# Altium PCB PCBV4.PcbDoc
Units mm, origin at the board's own origin, x right, y up, seen from the top; angles counter-clockwise.
Board outline 211.14 x 135.51 mm, 2 copper layers (Top Layer, Bottom Layer); 140 components, 56 nets, 344 pads, 6 vias.
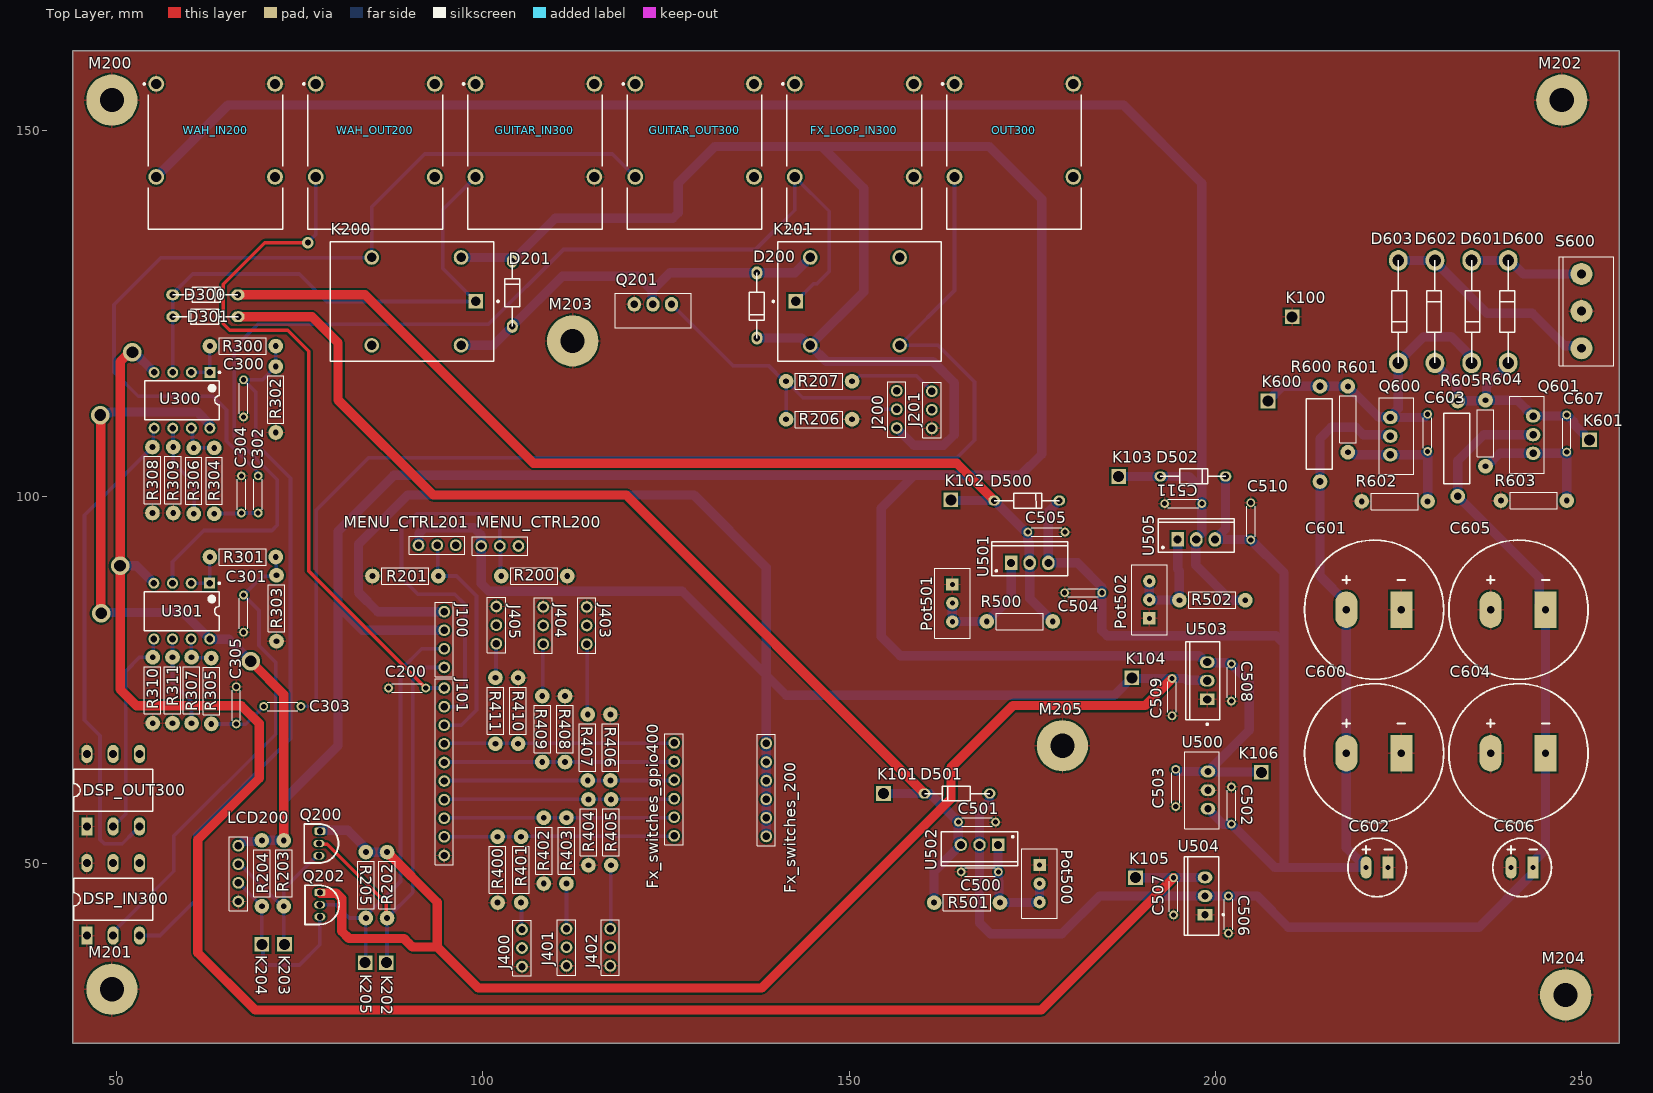
[diagram p0: Top Layer view]
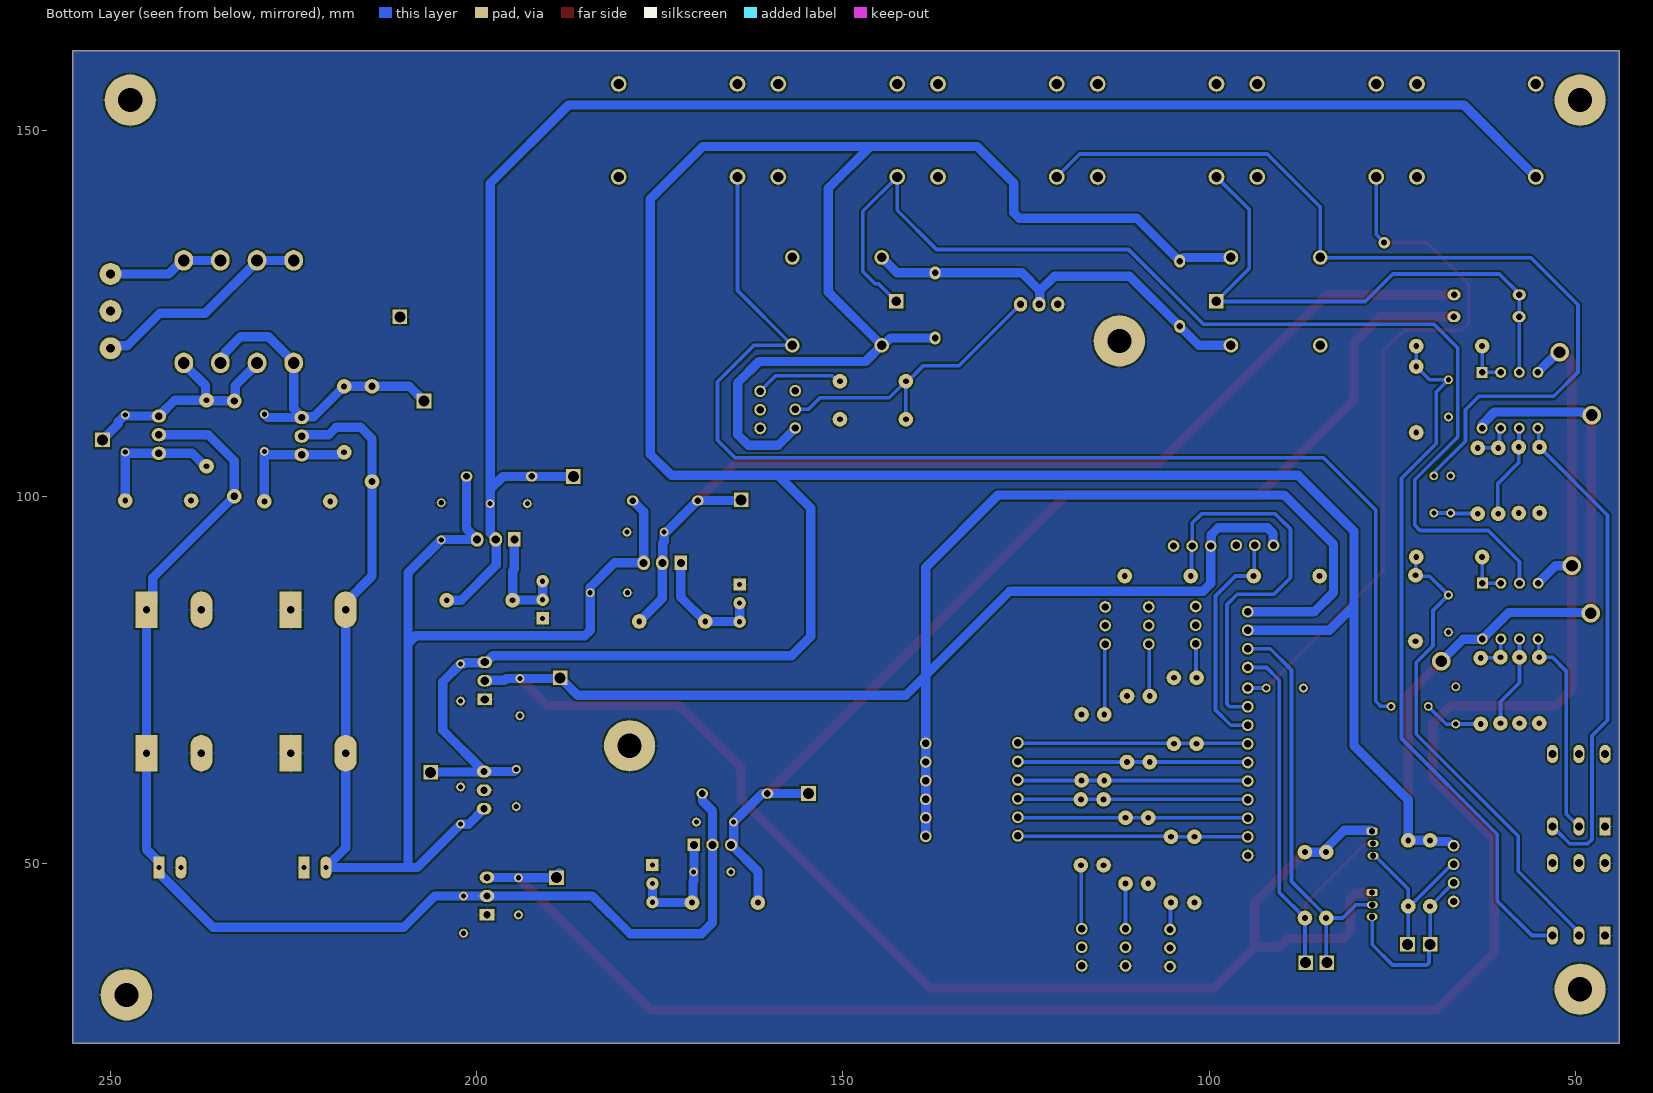
[diagram p1: Bottom Layer view, seen from below]
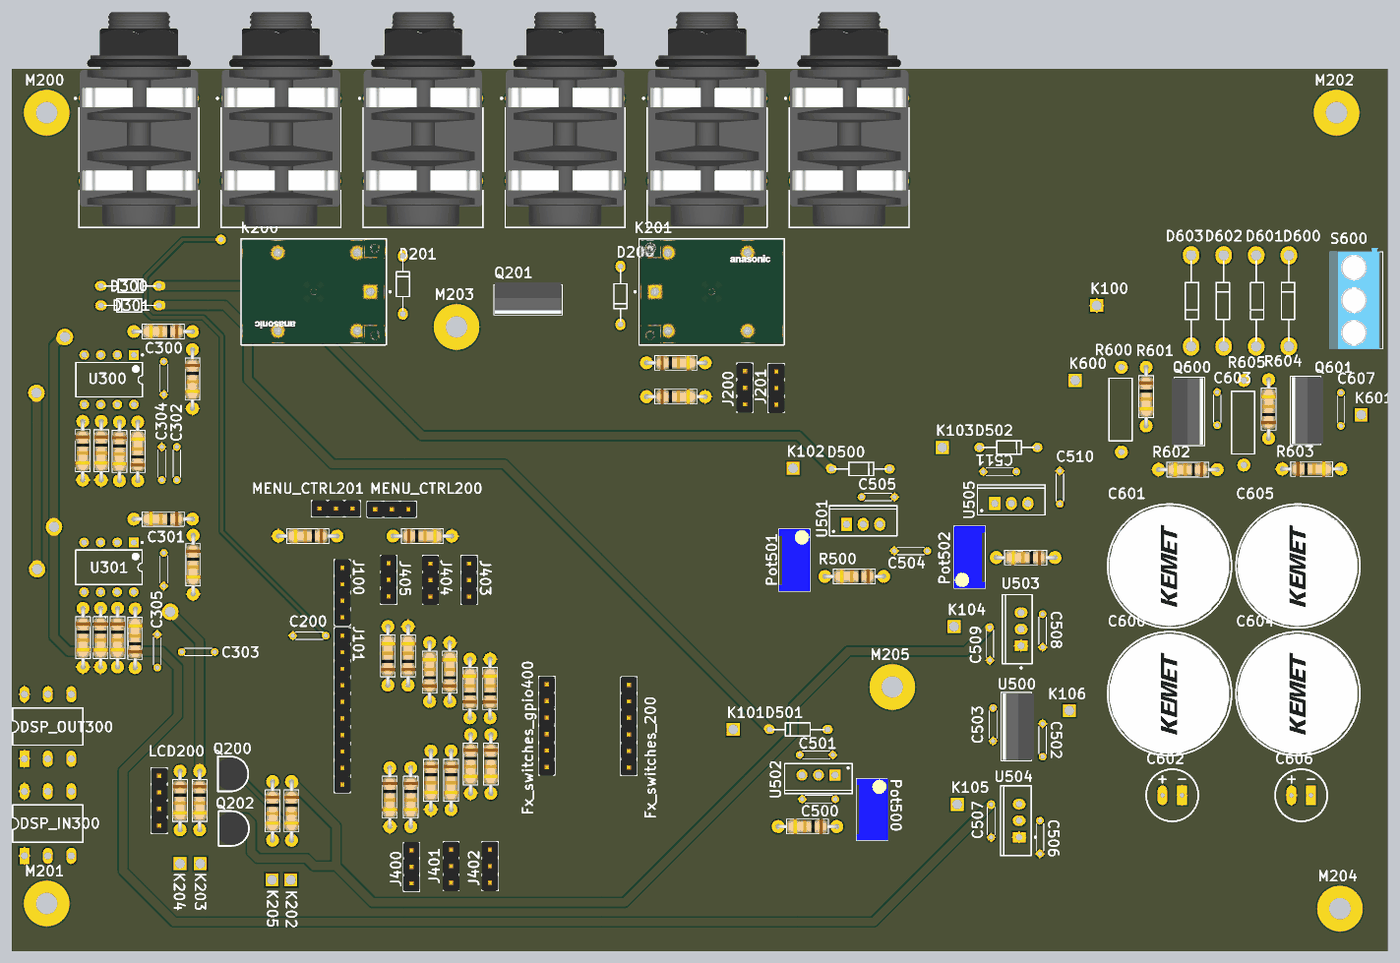
[diagram p2: 3D render of the assembled board from above, using the file's embedded part models]

## Layer stack, top to bottom
Top Solder: solder mask 0.0102, Solder Resist, Dk 3.5
Top Layer: signal copper 0.0356
Dielectric 1: dielectric 0.32, FR-4, Dk 4.8
Bottom Layer: signal copper 0.0356
Bottom Solder: solder mask 0.0102, Solder Resist, Dk 3.5

## Board outline
44,25.4 255.143,25.4 255.143,160.909 44,160.909

## Design rules (kind name [scope] priority, off if disabled: settings)
Clearance [All] p1: gap=0.254 ignorepadtopadclearanceinfootprint=FALSE
PolygonConnect [All] p1: connectstyle=Relief reliefconductorwidth=0.254 reliefentries=4 polygonreliefangle="90 Angle" airgapwidth=0.254
RoutingVias [All] p1: holewidth=0.711 width=1.27 viastyle="Through Hole" minholewidth=0.711 minwidth=1.27 maxholewidth=0.711 maxwidth=1.27
SolderMaskExpansion [All] p1: expansion=0.102 istentingtop=FALSE
Width [All] p1: maxlimit=1.27 minlimit=0.508 preferedwidth=0.508 minimp=50.000000 maximp=50.000000 favimp=50.000000
30 further rules are at their usual default settings.

## Classes and differential pairs
component class switches_LEDs: Fx_switches_gpio400 J400 J401 J402 J403 J404 J405 R400 R401 R402 R403 R404 R405 R406 R407 R408 R409 R410 R411
component class switches_connectors: C200 D200 D201 Fx_switches_200 J200 J201 K200 K201 K202 K203 K204 K205 LCD200 M200 M201 M202 M203 M204 M205 MENU_CTRL200 MENU_CTRL201 Q200 Q201 Q202 R200 R201 R202 R203 R204 R205 R206 R207 WAH_IN200 WAH_OUT200
component class regulators: C500 C501 C502 C503 C504 C505 C506 C507 C508 C509 C510 C511 D500 D501 D502 Pot500 Pot501 Pot502 R500 R501 R502 U500 U501 U502 U503 U504 U505
component class power_supply: C600 C601 C602 C603 C604 C605 C606 C607 D600 D601 D602 D603 K600 K601 Q600 Q601 R600 R601 R602 R603 R604 R605 S600
component class main: J100 J101 K100 K101 K102 K103 K104 K105 K106
component class amplifier_stage: C300 C301 C302 C303 C304 C305 D300 D301 DSP_IN300 DSP_OUT300 FX_LOOP_IN300 GUITAR_IN300 GUITAR_OUT300 OUT300 R300 R301 R302 R303 R304 R305 R306 R307 R308 R309 R310 R311 U300 U301

## Components (designator, comment, footprint, x,y, rotation, side; value= is the part's Value field where it differs from the comment)
C200 "Cap" Cap-1 87.1,73.9 r0 top value=100nF
C300 "Cap" Cap-1 67.3,110.92 r90 top value=12nF
C301 "Cap" Cap-1 67.3,81.52 r90 top value=12nF
C302 "Cap" Cap-1 69.3,102.88 r270 top value=100nF
C303 "Cap" Cap-1 75.133,71.399 r180 top value=100nF
C304 "Cap" Cap-1 67,102.88 r270 top value=5N5F
C305 "Cap" Cap-1 66.3,74.08 r270 top value=5N5F
C500 "Cap" Cap-1 170.38,48.8 r180 top value=100nF
C501 "Cap" Cap-1 164.92,55.6 r0 top value=1uF
C502 "Cap" Cap-1 202.2,60.4 r270 top value=100nF
C503 "Cap" Cap-1 194.6,57.72 r90 top value=1uF
C504 "Cap" Cap-1 179.426,86.919 r0 top value=100nF
C505 "Cap" Cap-1 179.48,95.2 r180 top value=1uF
C506 "Cap" Cap-1 201.8,45.5 r270 top value=100nF
C507 "Cap" Cap-1 194.3,48 r270 top value=1uF
C508 "Cap" Cap-1 202.2,72.12 r90 top value=10uF
C509 "Cap" Cap-1 194.1,70.12 r90 top value=10uF
C510 "Cap" Cap-1 204.851,99.212 r270 top value=100nF
C511 "Cap" Cap-1 193.091,99.085 r0 top value=1uF
C600 "Cap" "Cap Lyt Ø18" 217.9,65 r0 top value=1000uF
C601 "Cap" "Cap Lyt Ø18" 217.9,84.6 r0 top value=1000uF
C602 "Cap" "Cap Lyt Ø8" 220.6,49.4 r0 top value=220uF
C603 "Cap" Cap-1 229,106.22 r90 top value=1uF
C604 "Cap" "Cap Lyt Ø18" 237.6,65 r0 top value=1000uF
C605 "Cap" "Cap Lyt Ø18" 237.6,84.6 r0 top value=1000uF
C606 "Cap" "Cap Lyt Ø8" 240.4,49.4 r0 top value=220uF
C607 "Cap" Cap-1 248,111.2 r270 top value=1uF
D200 "1N4007" 1N4007#1 137.4,130.6 r270 top
D201 "1N4007" 1N4007#1 104,123.3 r90 top
D300 "1N4007" 1N4007#1 57.633,127.61 r0 top
D301 "1N4007" 1N4007#1 66.558,124.612 r180 top
D500 "1N4007" 1N4007#2 169.8,99.5 r0 top
D501 "1N4007" 1N4007#2 169.2,59.5 r180 top
D502 "1N4007" 1N4007#2 192.5,102.8 r0 top
D600 "Diode" "Diode 1A" 240,118.3 r90 top
D601 "Diode" "Diode 1A" 235,132.3 r270 top
D602 "Diode" "Diode 1A" 230,118.3 r90 top
D603 "Diode" "Diode 1A" 225,132.3 r270 top
DSP_IN300 "3.5MMJACK_STEREO" 3.5MMJACK_STEREO 45.9,40.1 r90 top
DSP_OUT300 "3.5MMJACK_STEREO" 3.5MMJACK_STEREO 45.9,55 r90 top
FX_LOOP_IN300 "NMJ4HFD2" FP-NMJ4HFD2-MFG 150.702,153.175 r90 top
Fx_switches_200 "Header 1x6" "Header 1x6" 138.685,53.644 r90 top
Fx_switches_gpio400 "Header 1x6" "Header 1x6" 126.1,66.42 r270 top
GUITAR_IN300 "NMJ4HFD2" FP-NMJ4HFD2-MFG 107.093,153.175 r90 top
GUITAR_OUT300 "NMJ4HFD2" FP-NMJ4HFD2-MFG 128.898,153.175 r90 top
J100 "Header 1x4" "Header 1x4" 94.7,76.72 r90 top
J101 "Header 1x10" "Header 1x10" 94.7,51.04 r90 top
J200 "Header 1x3" "Header 1x3" 156.5,109.42 r90 top
J201 "Header 1x3" "Header 1x3" 161.3,109.36 r90 top
J400 "Header 1x3" "Header 1x3" 105.325,35.86 r90 top
J401 "Header 1x3" "Header 1x3" 111.4,35.96 r90 top
J402 "Header 1x3" "Header 1x3" 117.375,35.96 r90 top
J403 "Header 1x3" "Header 1x3" 114.175,84.98 r270 top
J404 "Header 1x3" "Header 1x3" 108.225,84.98 r270 top
J405 "Header 1x3" "Header 1x3" 101.825,85.04 r270 top
K100 "Wire" "Wire 1.5mm" 210.5,124.6 r90 top
K101 "Wire" "Wire 1.5mm" 154.7,59.5 r90 top
K102 "Wire" "Wire 1.5mm" 163.9,99.6 r90 top
K103 "Wire" "Wire 1.5mm" 186.8,102.8 r90 top
K104 "Wire" "Wire 1.5mm" 188.6,75.3 r90 top
K105 "Wire" "Wire 1.5mm" 189.1,48 r90 top
K106 "Wire" "Wire 1.5mm" 206.3,62.4 r90 top
K200 "JS1-5V-F" FP-JS1-5V-F-MFG 90.3,126.7 r180 top
K201 "JS1-5V-F" FP-JS1-5V-F-MFG 151.4,126.7 r0 top
K202 "Wire" "Wire 1.5mm" 86.8,36.4 r90 top
K203 "Wire" "Wire 1.5mm" 72.9,38.9 r90 top
K204 "Wire" "Wire 1.5mm" 69.8,38.9 r90 top
K205 "Wire" "Wire 1.5mm" 83.9,36.4 r90 top
K600 "Wire" "Wire 1.5mm" 207.2,113.1 r90 top
K601 "Wire" "Wire 1.5mm" 251.1,107.8 r90 top
LCD200 "Header 1x4" "Header 1x4" 66.6,44.76 r90 top
M200 "Screw Hole" "M3 Hole" 49.323,154.194 r0 top
M201 "Screw Hole" "M3 Hole" 49.323,32.782 r0 top
M202 "Screw Hole" "M3 Hole" 247.316,154.194 r0 top
M203 "Screw Hole" "M3 Hole" 112.243,121.297 r0 top
M204 "Screw Hole" "M3 Hole" 247.842,31.999 r0 top
M205 "Screw Hole" "M3 Hole" 179.129,66.02 r0 top
MENU_CTRL200 "Header 1x3" "Header 1x3" 104.84,93.3 r180 top
MENU_CTRL201 "Header 1x3" "Header 1x3" 96.28,93.4 r180 top
OUT300 "NMJ4HFD2" FP-NMJ4HFD2-MFG 172.506,153.175 r90 top
Pot500 "Pot Trim" "Pot trim slim high" 176,47.2 r270 top value=1k
Pot501 "Pot Trim" "Pot trim slim high" 164.1,85.5 r270 top value=1k
Pot502 "Pot Trim" "Pot trim slim high" 191,85.96 r90 top value=1k
Q200 "ModelNum" TO-92_straight#1 77.6,53.94 r270 top
Q201 "ModelNum" TO-220#1 125.74,126.3 r180 top
Q202 "ModelNum" TO-92_straight#2 77.7,45.57 r270 top
Q600 "ModelNum" TO-220#1 223.9,110.84 r270 top
Q601 "ModelNum" TO-220#1 243.4,105.96 r90 top
R200 "Resistor" "RES THT 9mm" 111.5,89.2 r180 top value=1K
R201 "Resistor" "RES THT 9mm" 84.9,89.2 r0 top value=1K
R202 "Resistor" "RES THT 9mm" 86.9,42.5 r90 top value=4k7
R203 "Resistor" "RES THT 9mm" 72.8,44.1 r90 top value=4k7
R204 "Resistor" "RES THT 9mm" 69.8,44.1 r90 top value=4k7
R205 "Resistor" "RES THT 9mm" 84,42.5 r90 top value=4k7
R206 "Resistor" "RES THT 9mm" 150.4,110.6 r180 top value=4k
R207 "Resistor" "RES THT 9mm" 150.4,115.8 r180 top value=400
R300 "Resistor" "RES THT 9mm" 62.7,120.6 r0 top value=1K47
R301 "Resistor" "RES THT 9mm" 62.7,91.8 r0 top value=1k47
R302 "Resistor" "RES THT 9mm" 71.7,108.8 r90 top value=1K
R303 "Resistor" "RES THT 9mm" 71.8,80.3 r90 top value=1K
R304 "Resistor" "RES THT 9mm" 63.3,106.7 r270 top value=1k47
R305 "Resistor" "RES THT 9mm" 62.9,78 r270 top value=1k47
R306 "Resistor" "RES THT 9mm" 60.5,97.7 r90 top value=14k7
R307 "Resistor" "RES THT 9mm" 60.2,69.1 r90 top value=14k7
R308 "Resistor" "RES THT 9mm" 54.864,97.807 r90 top value=47k
R309 "Resistor" "RES THT 9mm" 57.7,97.8 r90 top value=10k
R310 "Resistor" "RES THT 9mm" 54.9,69.1 r90 top value=47k
R311 "Resistor" "RES THT 9mm" 57.6,69.1 r90 top value=10k
R400 "Resistor" "RES THT 9mm" 102,44.6 r90 top value=3k
R401 "Resistor" "RES THT 9mm" 105.2,44.6 r90 top value=300
R402 "Resistor" "RES THT 9mm" 108.3,47.2 r90 top value=3k
R403 "Resistor" "RES THT 9mm" 111.4,47.2 r90 top value=300
R404 "Resistor" "RES THT 9mm" 114.4,49.7 r90 top value=3k
R405 "Resistor" "RES THT 9mm" 117.5,49.7 r90 top value=300
R406 "Resistor" "RES THT 9mm" 117.4,70.3 r270 top value=3k
R407 "Resistor" "RES THT 9mm" 114.3,70.3 r270 top value=300
R408 "Resistor" "RES THT 9mm" 111.2,72.8 r270 top value=3k
R409 "Resistor" "RES THT 9mm" 108.1,72.8 r270 top value=300
R410 "Resistor" "RES THT 9mm" 104.8,75.3 r270 top value=3k
R411 "Resistor" "RES THT 9mm" 101.7,75.3 r270 top value=300
R500 "Resistor" "RES THT 9mm" 168.8,83 r0 top value=240
R501 "Resistor" "RES THT 9mm" 161.6,44.6 r0 top value=120
R502 "Resistor" "RES THT 9mm" 195.1,85.9 r0 top value=240
R600 "10" "POW RES THT 13mm" 214.3,115.1 r270 top
R601 "Resistor" "RES THT 9mm" 218.1,106.1 r90 top value=200k
R602 "Resistor" "RES THT 9mm" 220,99.4 r0 top value=10k
R603 "Resistor" "RES THT 9mm" 248,99.5 r180 top value=10k
R604 "Resistor" "RES THT 9mm" 236.9,113.2 r270 top value=200k
R605 "10" "POW RES THT 13mm" 233.1,113.1 r270 top
S600 "Screw 3" Screw-3 250,130.45 r270 top
U300 "OP275GPZ" ADI-N-8 58.9,113.2 r270 top
U301 "OP275GPZ" ADI-N-8 58.87,84.41 r270 top
U500 "LM7805" TO-220#2 199,57.42 r90 top
U501 "LM317T" TO-220#3 174.66,91 r0 top
U502 "LM337SP" TO220 167.8,52.5 r180 top
U503 "LT1086" LT-T-3 198.9,74.9 r180 top
U504 "LM7905" NDE0003A 198.6,45.5 r90 top
U505 "LM317T" TO-220#3 197.4,94.2 r0 top
WAH_IN200 "NMJ4HFD2" FP-NMJ4HFD2-MFG 63.485,153.175 r90 top
WAH_OUT200 "NMJ4HFD2" FP-NMJ4HFD2-MFG 85.289,153.175 r90 top

## Footprints (in the part's own frame and the unit in brackets; to place one, negate y for a bottom-side part, rotate by r counter-clockwise, add the part's x,y. Pads: shape width x height; smd on the part's side, far side on the other; paste and mask are expansions set on the pad)
1N4007#1 [mm]
  oval 1.8x1.5 hole 0.9: 1(0,0) 2(8.9,0)
  silkscreen extent 0,-1.02 8.9,1.02
1N4007#2 [mm]
  oval 1.6x1.4 hole 0.9: 1(0,0) 2(8.9,0)
  silkscreen extent 0,-1.02 8.9,1.02
3.5MMJACK_STEREO [mm]
  rect 2.5x1.5 hole 1.1: 1(0,0)
  oval 2.5x1.5 hole 1.1: 2(0,-3.6) 3(0,-7.2) 4(9.9,-7.2) 5(9.9,-3.6) 6(9.9,0)
  silkscreen extent 2.08,-9 7.82,1.8
ADI-N-8 [mm] "DIP, 8-Leads, Body 9.59x6.6mm, Pitch 2.54mm"
  rect 1.5x1.5 hole 0.9: 1(-3.81,3.81)
  round 1.5 hole 0.9: 2(-3.81,1.27) 3(-3.81,-1.27) 4(-3.81,-3.81) 5(3.81,-3.81) 6(3.81,-1.27) 7(3.81,1.27) 8(3.81,3.81)
  silkscreen extent -3.93,-5.1 2.65,5.24, body extent -3.95,-5.07 3.95,5.07, height 5.33
"Cap Lyt Ø8" [mm] "Capacitor"
  oval 1.5x3 hole 0.7: 1(0,0)
  rect 1.5x3 hole 0.7: 2(3,0)
  silkscreen extent -2.5,-4 5.5,4
"Cap Lyt Ø18" [mm] "Capacitor"
  oval 3x5 hole 1: 1(0,0)
  rect 3x5 hole 1: 2(7.5,0)
  silkscreen extent -5.7,-9.5 13.3,9.5, body extent -5.5,-9.25 13,9.25, height 38
Cap-1 [mm] "Capacitor with 1 space"
  round 1.2 hole 0.7: 1(0,0) 2(5.08,0)
  silkscreen extent 0.45,-0.58 4.62,0.58
"Diode 1A" [mm]
  oval 2.813x2.54 hole 1.6: 1(0,0) 2(14,0)
  silkscreen extent 0,-0.89 14,1.14
FP-JS1-5V-F-MFG [mm]
  rect 2x2 hole 1.3 paste-2539.97 mask+0: 1(-8.7,0)
  round 2 hole 1.3 paste-2539.97 mask+0: 2(-6.7,-6) 3(5.5,-6) 4(5.5,6) 5(-6.7,6)
  silkscreen extent -11.88,-8.15 11.15,8.15, body extent -11.25,-8.25 11.25,8.25, height 0.25
FP-NMJ4HFD2-MFG [mm]
  round 2.15 hole 1.4 paste-2539.97 mask+0: S(3.225,8.115) SN(3.225,-8.115) T(-9.475,8.115) TN(-9.475,-8.115)
  silkscreen extent -16.63,-9.2 3.35,9.87, body extent -16.73,-9.3 16.73,9.3, height 0.25
"Header 1x3" [mm]
  round 1.6 hole 1: 1(0,0) 2(2.54,0) 3(5.08,0)
  silkscreen extent -1.25,-1.25 6.33,1.25, body extent -1.26,-1.28 6.36,1.26, height 8.89
"Header 1x4" [mm]
  round 1.6 hole 1: 1(0,0) 2(2.54,0) 3(5.08,0) 4(7.62,0)
  silkscreen extent -1.25,-1.25 8.87,1.25, body extent -1.27,-1.27 8.89,1.27, height 8.89
"Header 1x6" [mm]
  round 1.6 hole 1: 1(0,0) 2(2.54,0) 3(5.08,0) 4(7.62,0) 5(10.16,0) 6(12.7,0)
  silkscreen extent -1.25,-1.25 13.95,1.25, body extent -1.26,-1.27 13.98,1.27, height 8.89
"Header 1x10" [mm]
  round 1.6 hole 1: 1(0,0) 2(2.54,0) 3(5.08,0) 4(7.62,0) 5(10.16,0) 6(12.7,0) 7(15.24,0) 8(17.78,0) 9(20.32,0) 10(22.86,0)
  silkscreen extent -1.25,-1.25 24.11,1.25, body extent -1.28,-1.27 24.12,1.27, height 8.89
LT-T-3 [mm] "T, 3-Leads, Body 10.55x4.6mm, Pitch 2.54mm"
  rect 2x1.6 hole 1.1: 1(0,2.54)
  oval 2x1.6 hole 1.1: 2(0,0) 3(0,-2.54)
  silkscreen extent -1.7,-5.3 2.9,6.07, body extent -1.7,-5.28 2.9,5.28, height 22.15
"M3 Hole" [mm]
  round 7 hole 3.3 mask+0: 1(0,0)
NDE0003A [mm] "FM, 3-Leads, Body 10.7x4.7mm, Pitch 2.54mm"
  rect 1.6x2 hole 1: 1(-2.54,0)
  oval 1.6x2 hole 1: 2(0,0) 3(2.54,0)
  silkscreen extent -5.35,-2.63 5.35,2.85, body extent -5.4,-1.9 5.4,2.9, height 19.4
"Pot trim slim high" [mm]
  rect 1.7x1.7 hole 0.71: 1(-2.54,0)
  round 1.7 hole 0.71: 2(0,0) 3(2.54,0)
  silkscreen extent -4.76,-2.41 4.76,2.42, body extent -4.76,-2.41 4.76,2.42, height 11.55
"POW RES THT 13mm" [mm]
  round 2 hole 1: 1(0,0) 2(13,0)
  silkscreen extent 1.68,-1.9 11.3,1.65
"RES THT 9mm" [mm]
  round 2 hole 0.8: 1(0,0) 2(9,0)
  silkscreen extent 1.28,-1.12 7.73,1.12, body extent -0.32,-1.13 9.28,1.14, height 2.36
Screw-3 [mm] "Screw Terminal with 3 connections"
  round 3 hole 1.2: 1(0,0) 2(5.075,0) 3(10.15,0)
  silkscreen extent -2.37,-3.03 12.52,4.43, body extent -2.95,-3.8 12.55,4, height 10.3
TO220 [mm] "TO, Thru-Hole, Vertical, Heatsink Mounted; 3 In-Line Leads; Pitch 2.54 mm"
  rect 1.7x1.7 hole 1.1: 1(-2.54,0)
  round 1.7 hole 1.1: 2(0,0) 3(2.54,0)
  silkscreen extent -5.2,-1.75 5.2,2.85, body extent -5.25,-1.8 5.25,2.9, height 19.7
TO-92_straight#1 [mm] "Transistor Outline 3 leads"
  rrect50% 1x1.5 hole 0.85 mask+0.05: 1(-0.416,0.124)
  oval 1x1.5 hole 0.85 mask+0.05: 2(1.27,0) 3(2.94,0)
  silkscreen extent -1.4,-2 3.94,2.67, body extent -1.24,-1.85 3.78,2.5, height 5.4
TO-92_straight#2 [mm] "Transistor Outline 3 leads"
  rrect50% 1x1.5 hole 0.85 mask+0.05: 1(-0.404,0.024)
  oval 1x1.5 hole 0.85 mask+0.05: 2(1.27,0) 3(2.898,0.024)
  silkscreen extent -1.4,-2 3.94,2.67, body extent -1.24,-1.85 3.78,2.5, height 5.4
TO-220#1 [mm] "Transistor Outline 3 leads"
  oval 1.8x2 hole 1: 1(0,0) 2(2.54,0) 3(5.08,0)
  silkscreen extent -2.73,-1.53 7.78,3.18, body extent -2.57,-1.85 7.62,2.95, height 18.9
TO-220#2 [mm] "Transistor Outline 3 leads"
  oval 1.6x2 hole 1: 1(0,0) 2(2.54,0) 3(5.08,0)
  silkscreen extent -2.73,-1.53 7.78,3.18, body extent -2.57,-1.85 7.62,2.95, height 18.9
TO-220#3 [mm] "TO, Thru-Hole, Vertical, Heatsink Mounted; 3 In-Line Leads; Pitch 2.54 mm"
  rect 1.7x2 hole 1.1: 1(-2.54,0)
  oval 1.7x2 hole 1.1: 2(0,0) 3(2.54,0)
  silkscreen extent -5.2,-1.75 5.2,2.85, body extent -5.25,-1.8 5.25,2.9, height 19.7
"Wire 1.5mm" [mm]
  rect 2x2 hole 1.5: 1(0,0)

## Part data
C200 C300 C301 C302 C303 C304 C305 C500 C501 C502 C503 C504 C505 C506 C507 C508 C509 C510 C511 C603 C607: library part "Capacitor 1 space"
C600 C601 C602 C604 C605 C606: library part "Capacitor electrolytic"
FX_LOOP_IN300 GUITAR_IN300 GUITAR_OUT300 OUT300 WAH_IN200 WAH_OUT200: library part CMP-78736-000001-1, "Conn 1/4\" Mono Jack F 3 POS Solder RA Thru-Hole 3 Terminal 1 Port", Current Rating=0.5A, Manufacturer=Neutrik, Package=0, Temperature="-25°C to +70°C", Temperature Range High=+70°C, Temperature Range Low=-25°C, Voltage Rating=50V, Automotive=No, Category=Conn, ComponentLink2Description=Datasheet, ComponentLink2URL=https://www.neutrik.com/en/product/nmj4hfd2.pdf, Conn Orientation=Horizontal, Contact Material=Silver, Device Class L1=Connectors, Device Class L2="Audio / Video Connectors", Device Class L3=unset, Footprint Url=https://www.neutrik.com/media/8576/download/st-nmj4hfd2.pdf?v=1, Height=15.89mm, Is Female=yes, Lead Free=Yes, Manufacturer Part Number=NMJ4HFD2, Mouser Description="Phone Audio Connector, Socket, 2, PCB Mount, Metal Body, Silver Plated Contacts", Number Of Contacts=2, Octopart=https://octopart.com/nmj4hfd2-neutrik-758952, RoHS=TRUE
K200 K201: library part CMP-05606-000016-1, "RELAY GEN PURPOSE SPDT 10A 5V", Ambient Temperature Range High=+70°C, Ambient Temperature Range Low=-40°C, Coil Current=72mA, Coil Power=360mW, Coil Resistance=69.4Ω, Coil Voltage=5V, Manufacturer=Panasonic, Switching Current=10A, Switching Power=150W, Temperature="-40°C to +70°C", Automotive=No, Category=Relay, Coil Type=Non-Latching, ComponentLink2Description=Datasheet, ComponentLink2URL=https://www3.panasonic.biz/ac/e_download/control/relay/power/catalog/mech_eng_js.pdf?via=ok, Device Class L1=Electromechanical, Device Class L2=Relays, Device Class L3="Power Relays", Digikey Description="RELAY GEN PURPOSE SPDT 10A 5V", Height=16.8mm, Lead Free=Yes, Manufacturer Part Number=JS1-5V-F, Mouser Description="JS Series 10 A SPDT 5 V Through Hole Sealed Miniature Non-Polarized Power Relay", Number Of Contacts=1, Octopart=https://octopart.com/js1-5v-f-panasonic-39428621, Package=JS1-5V-F, RoHS=TRUE, Standoff Height=0.3mm, Temperature Range High=+70°C, Temperature Range Low=-40°C, Throw Configuration=SPDT
Pot500 Pot501 Pot502: "Potentiometer"
Q200 Q201 Q202 Q601: library part "MOSFET N-Channel", Model=ModelNumber
Q600: library part "MOSFET P-Channel", Model=ModelNumber
R600 R605: library part "POW RES THT 13mm"
U300 U301: library part CMP-0384-00207-1, "Double Channel Excellent Sonic Characteristics Operational Amplifier, 9 MHz BW, 22 V/us SR, Industrial, 8-pin DIP (N-8), Tube", Amplifiers Per Package=2, Generic Part Number=OP275, Input Bias Current=100nA, Input Offset Voltage=1mV, Manufacturer="Analog Devices", Code_JEDEC=MS-001, ComponentLink1Description="Manufacturer URL", ComponentLink1URL=http://www.analog.com/en/index.html, ComponentLink2Description=Datasheet, ComponentLink2URL=http://www.analog.com/static/imported-files/data_sheets/OP275.pdf, ComponentLink3Description="Package Specification", ComponentLink3URL=http:/www.analog.com/static/imported-files/packages/PKG_PDF/PDIP(N)/N_8.pdf, DatasheetVersion="Rev. C", Iq/Amp=2.5mA, Mounting Technology="Through Hole", PackageDescription="8-Pin Plastic Dual In-Line Package, Row spacing 7.62 mm, Pitch 2.54 mm", PackageReference=N-8, PackageVersion=070606-A, PartNumber=OP275GPZ, Slew Rate=22V/us, Small Signal Bandwidth=9MHz, V Span Max=44V, V Span Min=9V
U500: library part "Voltage Regulator"
U501 U505: library part CMP-0244-00444-1, "1.5A, 1.2V to 37V Adjustable Voltage Regulator, 3-Pin TO-220", ComponentLink1Description="Manufacturer URL", ComponentLink1URL=http://www.st.com, ComponentLink2Description=Datasheet, ComponentLink2URL=http://www.st.com/internet/com/TECHNICAL_RESOURCES/TECHNICAL_LITERATURE/DATASHEET/CD00000455.pdf, ComponentLink3Description="Package Specification", ComponentLink3URL=http://www.st.com/internet/com/TECHNICAL_RESOURCES/TECHNICAL_LITERATURE/PACKAGE_INFORMATION/CD00004649.pdf, DatasheetVersion=1/11/2011, PackageDescription="TO, Thru-Hole, Vertical, Heatsink Mounted; 3 In-Line Leads; Pitch 2.54 mm", PackageReference=TO-220, PackageVersion=2011
U502: library part CMP-0244-00420-1, "Three-Terminal Negative Voltage Regulator, 3-Pin TO-220", ComponentLink1Description="Manufacturer URL", ComponentLink1URL=http://www.st.com, ComponentLink2Description=Datasheet, ComponentLink2URL=http://www.st.com/internet/com/TECHNICAL_RESOURCES/TECHNICAL_LITERATURE/DATASHEET/CD00000468.pdf, ComponentLink3Description="Package Specification", ComponentLink3URL=http://www.st.com/internet/com/TECHNICAL_RESOURCES/TECHNICAL_LITERATURE/PACKAGE_INFORMATION/CD00004649.pdf, DatasheetVersion=1/10/2011, PackageDescription="TO, Thru-Hole, Vertical, Heatsink Mounted; 3 In-Line Leads; Pitch 2.54 mm", PackageReference=TO220, PackageVersion=ver3.0
U503: library part CMP-0476-01904-1, "1.5 A Low Dropout Positive Regulator, 2.55 to 25 V Vin, Adjustable Vout, 3-pin FM (T-3), 0 to 150 degC, Pb-Free", Dropout Voltage(V)=1.3, Manufacturer="Linear Technology", Output Voltage=Adj, PartNumber=LT1086CT#PBF, ComponentLink1Description="Manufacturer URL", ComponentLink1URL=http://www.linear.com/, ComponentLink2Description=Datasheet, ComponentLink2URL=http://cds.linear.com/docs/en/datasheet/1086ffs.pdf, ComponentLink3Description="Package Specification", ComponentLink3URL=http://cds.linear.com/docs/en/packaging/TO-220_3_05-08-1420.pdf, DatasheetVersion="Rev. F", Discrete Pass Element=no, Iout(mA)=1500, Isupply(mA)=5, Mounting Technology="Through Hole", Number of Outputs=1, PackageDescription="3-Pin Plastic TO-220, Body 10.2235 x 4.3815 mm, Pitch 2.54 mm", PackageReference=T-3, PackageVersion=Jun-10, PSRR(dB)=75, RoHS=TRUE, Vin Max(V)=25, Vin Min(V)=2.55, Vout Max(V)=23.5, Vout Min(V)=1.25
U504: library part CMP-0062-02481-3, "3-Terminal Negative Regulator, 3-pin TO-220, Pb-Free", Manufacturer="Texas Instruments", PackageTopMarking=NSUZXYTTE#*LM7905CT, PowerWise=N, ComponentLink1Description="Datasheet URL", ComponentLink1URL=http://www.ti.com/general/docs/lit/getliterature.tsp?genericPartNumber=LM7905&fileType=pdf, CompType="LDO IC", PackageDescription="TO-220, Molded, 3 Lead, Straight", PackageReference=NDE0003A, PinCount=3, RoHS=Y

## Via types
v1: diameter 2.54, hole 1.6, Top Layer to Bottom Layer, 5 vias
v2: diameter 1.524, hole 0.813, Top Layer to Bottom Layer, 1 vias

## Nets (pads, with @x,y where several pads share a name; then routed paths per layer and width w, separated by ;. In a path a pad name is that pad's centre, name@x,y a point inside that pad or via, vN(x,y) a via of type N, cw(c..) or ccw(c..) an arc to the next point about the centre after c; other vN are vias at no path point)
+1V75: C505.2 D300.2 D500.1 K102.1 R500.2 U501.2 | length 140.8
  Top Layer w1.27: D300.2 83.896,127.61 106.909,104.597 164.703,104.597 D500.1
  Bottom Layer w1.27: K102.1 163.975,99.525 169.775,99.525 D500.1 174.1,95.2 C505.2 174.4,93.916 174.578,93.739 174.578,91.082 U501.2 174.66,86.14 R500.2
+2V: C511.2 D502.1 K103.1 R502.2 U505.2 WAH_IN200.T | length 224.6
  Bottom Layer w1.27: WAH_IN200.T 65.188,153.518 187.477,153.518 198.171,142.824 198.171,101.041 ; K103.1 D502.1 196.412,102.8 198.171,101.041 ; R502.2 202.12,85.9 197.32,90.7 197.32,94.12 U505.2 197.4,94.316 198.171,95.087 C511.2 198.171,101.041
+3V3: C509.2 Fx_switches_200.1 Fx_switches_200.2 Fx_switches_200.3 Fx_switches_200.4 Fx_switches_200.5 Fx_switches_200.6 J100.4 K104.1 MENU_CTRL200.3 MENU_CTRL201.3 Q200.1 Q202.1 R202.2 R205.2 U503.2 | length 413.7
  Top Layer w1.27: Q202.1 77.798,45.9 79.977,45.9 80.721,45.156 80.721,40.691 81.712,39.7 89.205,39.7 89.841,39.064 90.373,38.532 93.751,38.532 ; R202.2 93.751,44.649 93.751,38.532 ; C509.2 190.426,71.526 172.364,71.526 163.906,63.068 163.906,58.801 138.049,32.944 99.339,32.944 93.751,38.532
  Bottom Layer w1.27: Q200.1 77.724,54.368 77.839,54.483 81.534,54.483 83.86,52.157 83.86,51.64 R205.2 R202.2 ; MENU_CTRL201.3 91.263,93.463 91.263,95.039 92.007,95.783 98.755,95.783 99.697,94.842 99.697,93.363 MENU_CTRL200.3 99.76,88.173 100.825,87.108 127.219,87.108 138.685,75.642 ; J100.4 85.637,84.34 83.011,86.966 83.011,93.552 89.713,100.254 128.803,100.254 138.685,90.373 138.685,75.642 ; Fx_switches_200.1 Fx_switches_200.2 Fx_switches_200.3 Fx_switches_200.4 Fx_switches_200.5 Fx_switches_200.6 138.685,75.642 ; U503.2 198.818,74.982 196.161,74.982 195.944,75.2 C509.2 188.7,75.2 K104.1 186.223,72.923 141.403,72.923 138.685,75.642
+5V: C503.2 C508.2 D200.2 D201.2 J100.3 J200.1 K106.1 K200.2 K201.2 LCD200.4 R203.2 R204.2 U300.8 U301.8 U500.3 U503.3 | length 567.8
  Top Layer w1.27: v1(47.752,111.176) 47.805,111.123 47.805,84.152 v1(47.857,84.099) ; v1@68.478,77.343 72.8,73.021 R203.2
  Bottom Layer w1.27: v1(47.752,111.176) 47.995,111.419 48.893,111.419 49.074,111.6 61,111.6 62.666,109.934 62.666,109.434 U300.8 ; v1@47.955,84.226 59.054,84.226 U301.8 62.724,80.556 65.295,80.556 v1(68.279,77.572) ; LCD200.4 66.689,52.38 67.27,52.96 69.66,52.96 R204.2 R203.2 72.8,58.627 80.213,66.04 80.213,85.141 ; J100.3 83.554,81.8 80.213,85.141 ; K200.2 D201.2@103.465,132.7 ; D201.2 109.874,138.074 125.926,138.074 126.67,138.818 126.67,142.875 131.648,147.853 146.279,147.853 ; D200.2 143.502,121.7 144.502,120.7 K201.2 ; J200.1 156.5,109.387 158.826,107.061 162.89,107.061 164.338,108.509 164.338,115.595 161.442,118.491 146.909,118.491 K201.2 ; C503.2 194.9,62.5 U500.3 ; K106.1 206.25,62.45 199.05,62.45 U500.3 ; 80.213,85.141 80.213,95.326 87.833,102.946 158.852,102.946 ; K201.2 151.994,127.994 151.994,142.138 146.279,147.853 ; 146.279,147.853 169.139,147.853 176.301,140.691 176.301,105.842 173.406,102.946 158.852,102.946 ; 158.852,102.946 154.381,98.476 154.381,80.95 156.997,78.334 197.791,78.334 198.685,77.44 U503.3 198.982,77.358 201.639,77.358 201.796,77.2 C508.2 204.648,74.752 204.648,68.148 U500.3
+6V: C502.2 C504.2 C510.2 C600.1 C601.1 C602.1 D500.2 D502.2 Q600.2 R600.2 U500.1 U501.3 U505.3 | length 206.9
  Bottom Layer w1.27: D500.2 178.7,99.465 177.2,97.965 U501.3 181.186,91 184.506,87.681 C504.2 184.506,81.77 185.25,81.026 193.192,81.026 193.218,81.051 208.28,81.051 209.372,79.959 ; U500.1 201.1,55.32 C502.2 208.12,49.4 209.372,49.4 ; D502.2 201.4,95.66 U505.3 204.809,94.2 209.372,89.637 209.372,79.959 ; Q600.2 223.799,108.401 223.424,108.401 223.325,108.5 220.2,108.5 219.2,109.5 215.844,109.5 214.3,107.956 R600.2 214.3,89.2 217.9,85.6 C601.1 C600.1 217.9,52.1 C602.1 209.372,49.4 ; 209.372,49.4 209.372,79.959
-1V75: C501.1 D301.1 D501.2 K101.1 R501.1 U502.3 | length 149.8
  Top Layer w1.27: D301.1 76.657,124.612 80.213,121.056 80.213,113.233 93.193,100.254 119.546,100.254 D501.2
  Bottom Layer w1.27: K101.1 D501.2 160.325,59.475 161.045,59.475 C501.1 164.92,52.956 165.26,52.616 U502.3 161.6,48.84 R501.1
-5V: C507.1 K105.1 U300.4 U301.4 U504.3 | length 266.7
  Top Layer w1.27: v1(52.125,119.761) 51.74,119.761 50.444,118.466 v1(50.444,90.602) 50.444,73.736 52.68,71.501 66.999,71.501 69.444,69.056 69.444,61.57 61.062,53.188 61.062,37.77 68.885,29.947 176.247,29.947 C507.1
  Bottom Layer w1.27: v1(50.444,90.602) 52.678,90.602 U301.4 ; v1(52.125,119.761) 52.339,119.761 U300.4 ; K105.1@188.735,48.704 188.735,48.365 K105.1 C507.1 194.34,48.04 U504.3
-6V: C506.1 C604.2 C605.2 C606.2 D501.1 Q601.2 R605.2 U502.2 U504.2 | length 175.2
  Bottom Layer w1.27: D501.1 169.175,59.475 169.175,58.475 167.8,57.1 167.8,41.852 168.632,41.02 169.316,40.335 179.045,40.335 184.209,45.5 U504.2 C506.1 205.731,45.5 209.982,41.25 236,41.25 243.4,48.65 C606.2 243.4,50.15 245.1,51.85 C604.2 C605.2 244.235,85.465 244.235,88.965 R605.2 233.1,104.932 236.668,108.5 Q601.2
FX_DSP_IN: C301.2 DSP_IN300.2 R301.2 R303.2 | length 65.7
  Bottom Layer w0.508: DSP_IN300.2 49.5,40.6 57.785,48.885 57.785,53.685 71.7,67.6 71.7,77.4 69.418,79.682 69.418,84.482 C301.2 69.851,89.151 71.651,89.151 R303.2 71.75,89.35 71.75,91.75 R301.2
FX_DSP_OUT: DSP_OUT300.2 R310.2 U301.5 | length 29
  Bottom Layer w0.508: DSP_OUT300.2 51.232,56.732 51.232,76.225 53.106,78.1 R310.2 54.98,78.18 54.98,80.52 U301.5
GND: C200.1 C300.1 C301.1 C304.1 C305.1 C500.2 C501.2 C502.1 C503.1 C504.1 C505.1 C506.2 C507.2 C508.1 C509.1 C510.1 C511.1 C600.2 C601.2 C602.2 C604.1 C605.1 C606.1 DSP_IN300.1 DSP_IN300.6 DSP_OUT300.1 DSP_OUT300.6 FX_LOOP_IN300.S FX_LOOP_IN300.SN FX_LOOP_IN300.TN GUITAR_IN300.S GUITAR_IN300.SN GUITAR_IN300.TN GUITAR_OUT300.S GUITAR_OUT300.SN J101.1 J201.1 J400.1 J401.1 J402.1 J403.1 J404.1 J405.1 K100.1 LCD200.1 M200.1 M201.1 M202.1 M203.1 M204.1 M205.1 OUT300.S OUT300.SN Pot500.1 Pot501.1 Pot502.1 Q201.3 R200.1 R201.1 R206.1 R302.1 R303.1 R308.1 R309.1 R310.1 R311.1 R400.1 R402.1 R404.1 R406.1 R408.1 R410.1 R602.1 R603.2 S600.2 U500.2 U503.1 U504.1 WAH_IN200.S WAH_IN200.SN WAH_OUT200.S WAH_OUT200.SN
GPAIN1: C200.2 J101.10 WAH_OUT200.T | length 97.3
  Top Layer w0.508: v2@76.2,134.595 v2(76.073,134.722) 70.206,134.722 64.516,129.032 64.516,123.665 65.423,122.758 73.33,122.758 76.2,119.888 76.2,89.88 C200.2
  Bottom Layer w0.508: v2(76.073,134.722) 77.174,135.823 WAH_OUT200.T ; C200.2 J101.10
GPIO4: J101.9 MENU_CTRL200.2 R200.2 | length 55.5
  Bottom Layer w0.508: J101.9 97.217,71.36 97.536,71.679 97.536,85.319 96.139,86.716 91.135,86.716 88.875,88.976 88.875,95.606 90.957,97.688 101.041,97.688 102.3,96.43 MENU_CTRL200.2 102.4,93.2 102.4,89.3 R200.2
GPIO5: J101.8 MENU_CTRL201.2 R201.2 | length 31.5
  Bottom Layer w0.508: MENU_CTRL201.2 93.82,93.32 93.82,89.28 R201.2 96.4,89.2 99.111,86.489 99.111,70.891 97.039,68.82 J101.8
GPIO10: Fx_switches_gpio400.1 J101.7 R410.2 R411.2 | length 31.5
  Bottom Layer w0.508: J101.7 94.77,66.35 126.03,66.35 Fx_switches_gpio400.1
GPIO11: Fx_switches_gpio400.2 J101.6 R408.2 R409.2 | length 31.5
  Bottom Layer w0.508: J101.6 94.77,63.81 126.03,63.81 Fx_switches_gpio400.2
GPIO12: Fx_switches_gpio400.4 J101.4 R404.2 R405.2 | length 31.5
  Bottom Layer w0.508: J101.4 94.77,58.73 126.03,58.73 Fx_switches_gpio400.4
GPIO13: Fx_switches_gpio400.3 J101.5 R406.2 R407.2 | length 31.5
  Bottom Layer w0.508: J101.5 94.77,61.27 126.03,61.27 Fx_switches_gpio400.3
GPIO14: Fx_switches_gpio400.5 J101.3 R402.2 R403.2 | length 31.5
  Bottom Layer w0.508: J101.3 94.77,56.19 126.03,56.19 Fx_switches_gpio400.5
GPIO15: Fx_switches_gpio400.6 J101.2 R400.2 R401.2 | length 31.5
  Bottom Layer w0.508: J101.2 94.71,53.59 101.99,53.59 R400.2 R401.2 105.26,53.66 126.04,53.66 Fx_switches_gpio400.6
I2C_SCL: J100.2 K205.1 Q202.2 R205.1 | length 56.2
  Bottom Layer w0.508: Q202.2 79.94,44.3 81.74,42.5 R205.1 ; K205.1 84,36.5 R205.1 ; J100.2 91.63,79.26 88.748,76.378 88.748,47.498 84,42.75 R205.1
I2C_SDA: J100.1 K202.1 Q200.2 R202.1 | length 59.6
  Top Layer w0.508: Q200.2@77.694,52.576 78.292,52.576 78.742,52.576 86.8,44.518 86.8,42.6 R202.1
  Bottom Layer w0.508: K202.1 86.9,36.5 R202.1 90.4,46 90.4,74.982 92.138,76.72 J100.1
NetC300_2: C300.2 DSP_IN300.3 R300.2 R302.2 | length 96.7
  Bottom Layer w0.508: DSP_IN300.3 55.899,40.1 60.63,44.831 60.63,53.93 73.7,67 73.7,102.551 68.961,107.29 68.961,114.339 C300.2 69.9,116 R302.2 R300.2
NetC302_1: C302.1 GUITAR_OUT300.T K200.3 | length 122.5
  Bottom Layer w0.508: C302.1 69.168,103.012 69.168,103.425 64.973,107.62 64.973,111.912 63.144,113.741 52.934,113.741 49.606,117.069 49.606,126.238 56.032,132.664 84.764,132.664 K200.3 84.8,139.588 92.05,146.837 117.645,146.837 GUITAR_OUT300.T
NetC302_2: C302.2 C304.2 R304.2 | length 6
  Bottom Layer w0.508: R304.2 63.35,97.75 66.95,97.75 C304.2 C302.2
NetC303_1: C303.1 K201.3 OUT300.T | length 168.7
  Bottom Layer w0.508: C303.1 76.53,71.399 77.216,72.085 77.216,98.222 84.328,105.334 164.694,105.334 167.107,107.747 167.107,115.722 162.129,120.7 K201.3 164.391,128.191 OUT300.T
NetC303_2: C303.2 C305.2 R305.2 | length 8.2
  Bottom Layer w0.508: R305.2 C305.2 66.35,68.95 67.604,68.95 C303.2
NetC500_1: C500.1 Pot500.2 Pot500.3 R501.2 U502.1 | length 16
  Bottom Layer w1.27: U502.1 170.34,48.84 C500.1 170.38,47.558 170.46,47.477 170.46,44.74 R501.2 170.63,44.63 175.97,44.63 Pot500.3 Pot500.2
NetC603_1: C603.1 Q600.3 R601.1 R602.2 | length 18.1
  Bottom Layer w1.27: R601.1 218.24,105.96 218.756,105.96 218.956,105.76 228.54,105.76 C603.1 229,105.76 R602.2
NetC603_2: C603.2 D601.2 D603.2 K600.1 Q600.1 R600.1 R601.2 | length 45.9
  Bottom Layer w1.27: K600.1 209.2,115.1 R600.1 R601.2 222.259,110.941 223.799,110.941 Q600.1 228.54,110.84 C603.2 ; Q600.1@223.9,110.983 225,112.083 D603.2 225,118.436 228.458,121.895 232.207,121.895 234.365,119.736 234.365,119.415 235,118.78 D601.2
NetC607_1: C607.1 D600.1 D602.1 K601.1 Q601.3 R604.1 R605.1 | length 33.5
  Bottom Layer w1.27: D602.1 230,118.164 232.96,115.203 232.96,113.24 R605.1 233.15,113.15 236.85,113.15 R604.1 ; D600.1 240,118.164 237.04,115.203 237.04,113.34 R604.1 ; K601.1 248.939,109.961 248.939,110.261 C607.1 247.84,111.04 Q601.3 241.24,113.2 R604.1
NetC607_2: C607.2 Q601.1 R603.1 R604.2 | length 18.5
  Bottom Layer w1.27: R604.2 237.098,104.2 238.858,105.96 Q601.1 247.84,105.96 C607.2 R603.1
NetD200_1: D200.1 D201.1 K200.5 K201.5 Q201.2 | length 56.2
  Bottom Layer w1.27: K200.5 101.4,120.7 D201.1 110.85,130.15 121.107,130.15 123.099,128.158 ; Q201.2 123.099,126.401 123.099,128.158 ; K201.5 142.6,130.6 D200.1 125.54,130.6 123.099,128.158
NetD300_1: D300.1 D301.2 GUITAR_IN300.T K200.1 U300.3 | length 75.5
  Bottom Layer w0.508: U300.3 57.615,117.025 57.615,122.174 57.615,124.5 57.615,127.685 57.6,127.7 60.354,130.454 74.905,130.454 78.659,126.7 K200.1 94.513,131.187 94.513,139.235 GUITAR_IN300.T
NetD600_2: D600.2 D601.1 S600.1 | length 15.8
  Bottom Layer w1.27: D601.1 D600.2 240.207,132.3 242.057,130.45 S600.1
NetD602_2: D602.2 D603.1 S600.3 | length 30.1
  Bottom Layer w1.27: D603.1 D602.2 230,132.164 237.094,125.07 243.281,125.07 247.72,120.631 249.669,120.631 S600.3
NetDSP_OUT300_3: DSP_OUT300.3 R308.2 U300.5 | length 68.1
  Bottom Layer w0.508: DSP_OUT300.3 53.1,54.768 52.642,54.31 52.41,54.31 50.729,52.629 48.311,52.629 47.7,53.24 47.7,67.387 45.568,69.52 45.568,97.511 54.661,106.604 54.661,106.731 54.737,106.807 R308.2 54.977,106.92 54.977,109.277 U300.5 U300.5@55.09,109.122
NetFX_LOOP_IN300_T: FX_LOOP_IN300.T K201.1 U301.3 | length 155.9
  Bottom Layer w0.508: U301.3 57.6,91.153 61.874,95.428 71.171,95.428 71.907,96.164 71.907,102.337 66.04,108.204 66.04,120.34 69.3,123.6 100.8,123.6 110.982,133.782 137.211,133.782 142.587,139.158 FX_LOOP_IN300.T 147.269,139.018 147.269,130.785 145.6,129.115 145.115,129.115 K201.1
NetJ200_2: J200.2 Q201.1 R206.2 R207.2 | length 41.9
  Bottom Layer w0.508: Q201.1 134.108,117.932 138.989,117.932 141.121,115.8 R207.2 ; R206.2 R207.2 ; J200.2 154.689,111.96 153.111,113.538 143.662,113.538 R207.2
NetJ201_3: J201.3 R207.1 | length 12.1
  Bottom Layer w0.508: R207.1 150.708,115.8 151.444,116.535 159.205,116.535 J201.3
NetJ400_3: J400.3 R401.1 | length 3.7
  Bottom Layer w0.508: R401.1 105.263,44.537 105.263,41.002 J400.3
NetJ401_3: J401.3 R403.1 | length 6.2
  Bottom Layer w0.508: J401.3 R403.1
NetJ402_3: J402.3 R405.1 | length 8.7
  Bottom Layer w0.508: J402.3 117.438,41.103 117.438,49.638 R405.1
NetJ403_3: J403.3 R407.1 | length 9.7
  Bottom Layer w0.508: J403.3 114.238,79.837 114.238,70.362 R407.1
NetJ404_3: J404.3 R409.1 | length 7.2
  Bottom Layer w0.508: R409.1 108.163,72.863 108.163,79.838 J404.3
NetJ405_3: J405.3 R411.1 | length 4.7
  Bottom Layer w0.508: R411.1 101.763,75.363 101.763,79.898 J405.3
NetK203_1: K203.1 LCD200.3 Q200.3 R203.1 | length 22.9
  Bottom Layer w0.508: LCD200.3 66.83,49.84 72.57,44.1 R203.1 ; K203.1 72.8,39 R203.1 ; Q200.3 77.35,51 72.8,46.45 R203.1
NetK204_1: K204.1 LCD200.2 Q202.3 R204.1 | length 25.2
  Bottom Layer w0.508: LCD200.2 R204.1 K204.1 69.952,38.748 69.952,36.366 70.249,36.068 74.93,36.068 77.7,38.838 77.7,42.648 Q202.3
NetPot501_2: Pot501.2 Pot501.3 R500.1 U501.1 | length 16.6
  Bottom Layer w1.27: Pot501.2 Pot501.3 164.12,82.98 168.78,82.98 R500.1 172.12,86.32 U501.1
NetPot502_2: Pot502.2 Pot502.3 R502.1 U505.1 | length 15.1
  Bottom Layer w1.27: Pot502.3 Pot502.2 191.03,85.93 195.07,85.93 R502.1 195.1,89.921 194.86,90.161 U505.1
NetR300_1: R300.1 U300.1 U300.2 | length 6.1
  Bottom Layer w0.508: U300.2 U300.1 62.705,117.015 62.705,120.595 R300.1
NetR301_1: R301.1 U301.1 U301.2 | length 6.1
  Bottom Layer w0.508: U301.2 U301.1 62.69,88.23 62.69,91.79 R301.1
NetR304_1: R304.1 R306.2 U300.7 | length 5.6
  Bottom Layer w0.508: U300.7 60.335,109.225 60.335,106.865 R306.2 R304.1
NetR305_1: R305.1 R307.2 U301.7 | length 5.3
  Bottom Layer w0.508: U301.7 60.17,80.57 60.17,78.13 R307.2 60.25,78.05 62.85,78.05 R305.1
NetR306_1: R306.1 R309.2 U300.6 | length 12.9
  Bottom Layer w0.508: U300.6 57.665,109.355 57.665,106.835 R309.2 57.7,104.708 60.554,101.854 60.554,97.754 R306.1
NetR307_1: R307.1 R311.2 U301.6 | length 12.6
  Bottom Layer w0.508: U301.6 57.6,74.632 60.2,72.032 R307.1
pads on no net: DSP_IN300.4 DSP_IN300.5 DSP_OUT300.4 DSP_OUT300.5 GUITAR_OUT300.TN J200.3 J201.2 J400.2 J401.2 J402.2 J403.2 J404.2 J405.2 K200.4 K201.4 MENU_CTRL200.1 MENU_CTRL201.1 OUT300.TN WAH_IN200.TN WAH_OUT200.TN

## Polygon pours and split planes (outlines as drawn)
GND on Top Layer "GND_L01_P001" (solid, pour order 1): 44.018,25.4 44.018,160.884 43.993,160.909 255.143,160.909 255.143,25.4 43.993,25.4
GND on Bottom Layer "GND_L02_P000" (solid, pour order 0): 44,25.5 44,160.9 255.1,160.9 255.143,160.857 255.143,25.4 43.993,25.4 43.993,25.527